# EAGLE board Motorcontroller (EAGLE 6.4)
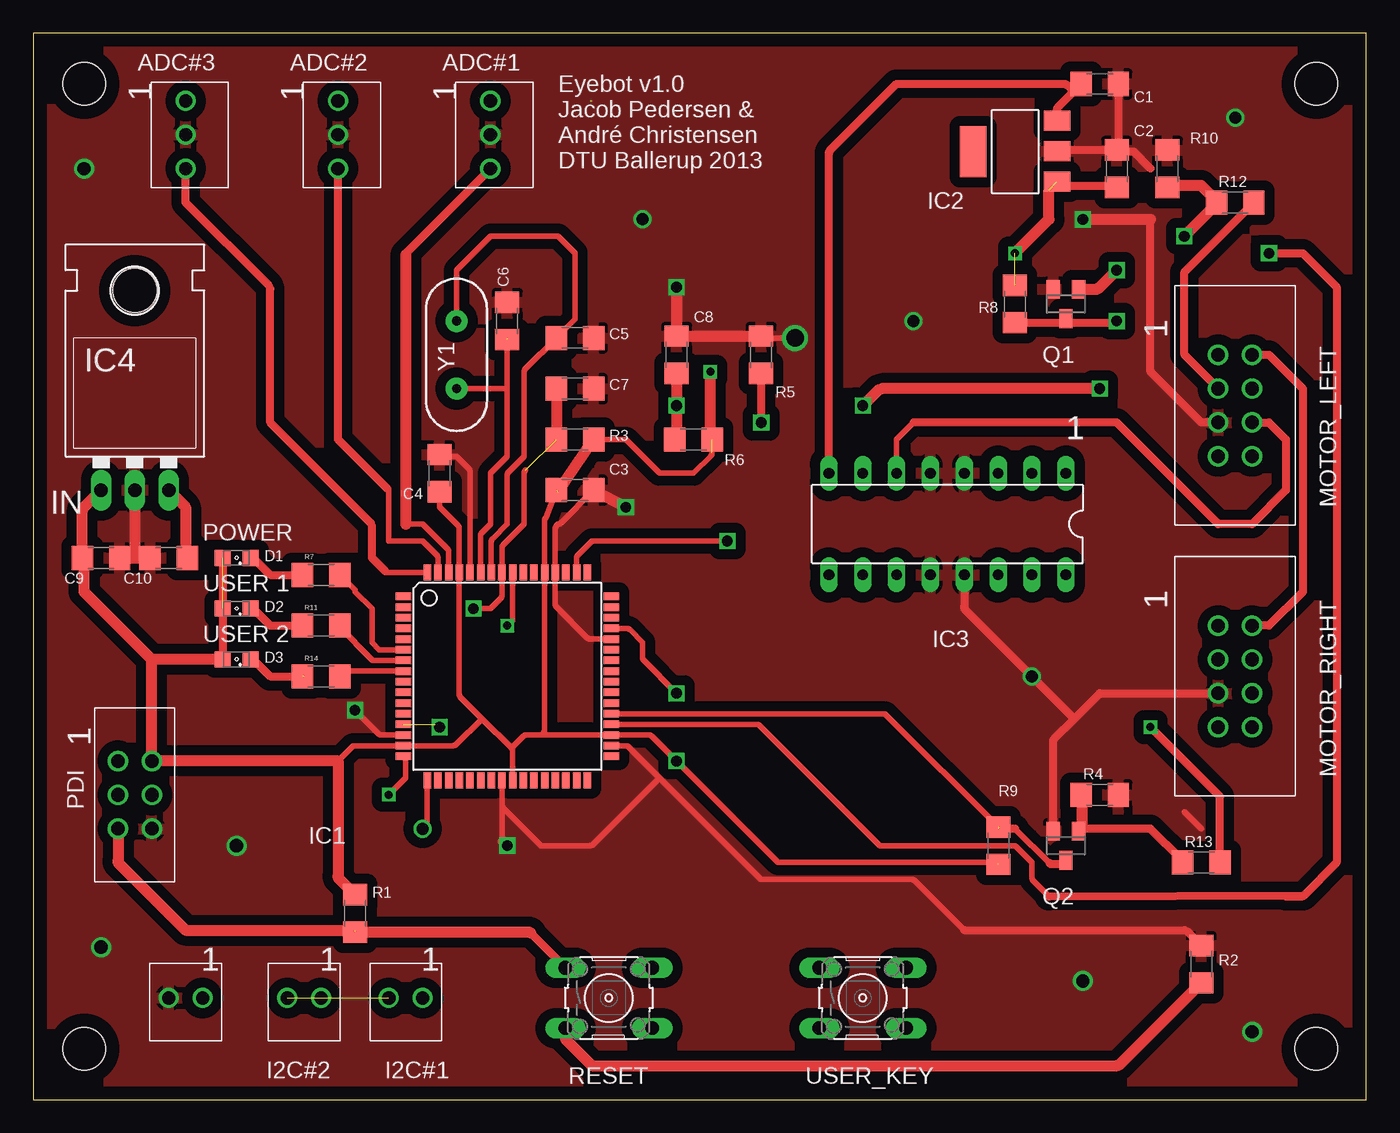
[diagram p0: board, top side]
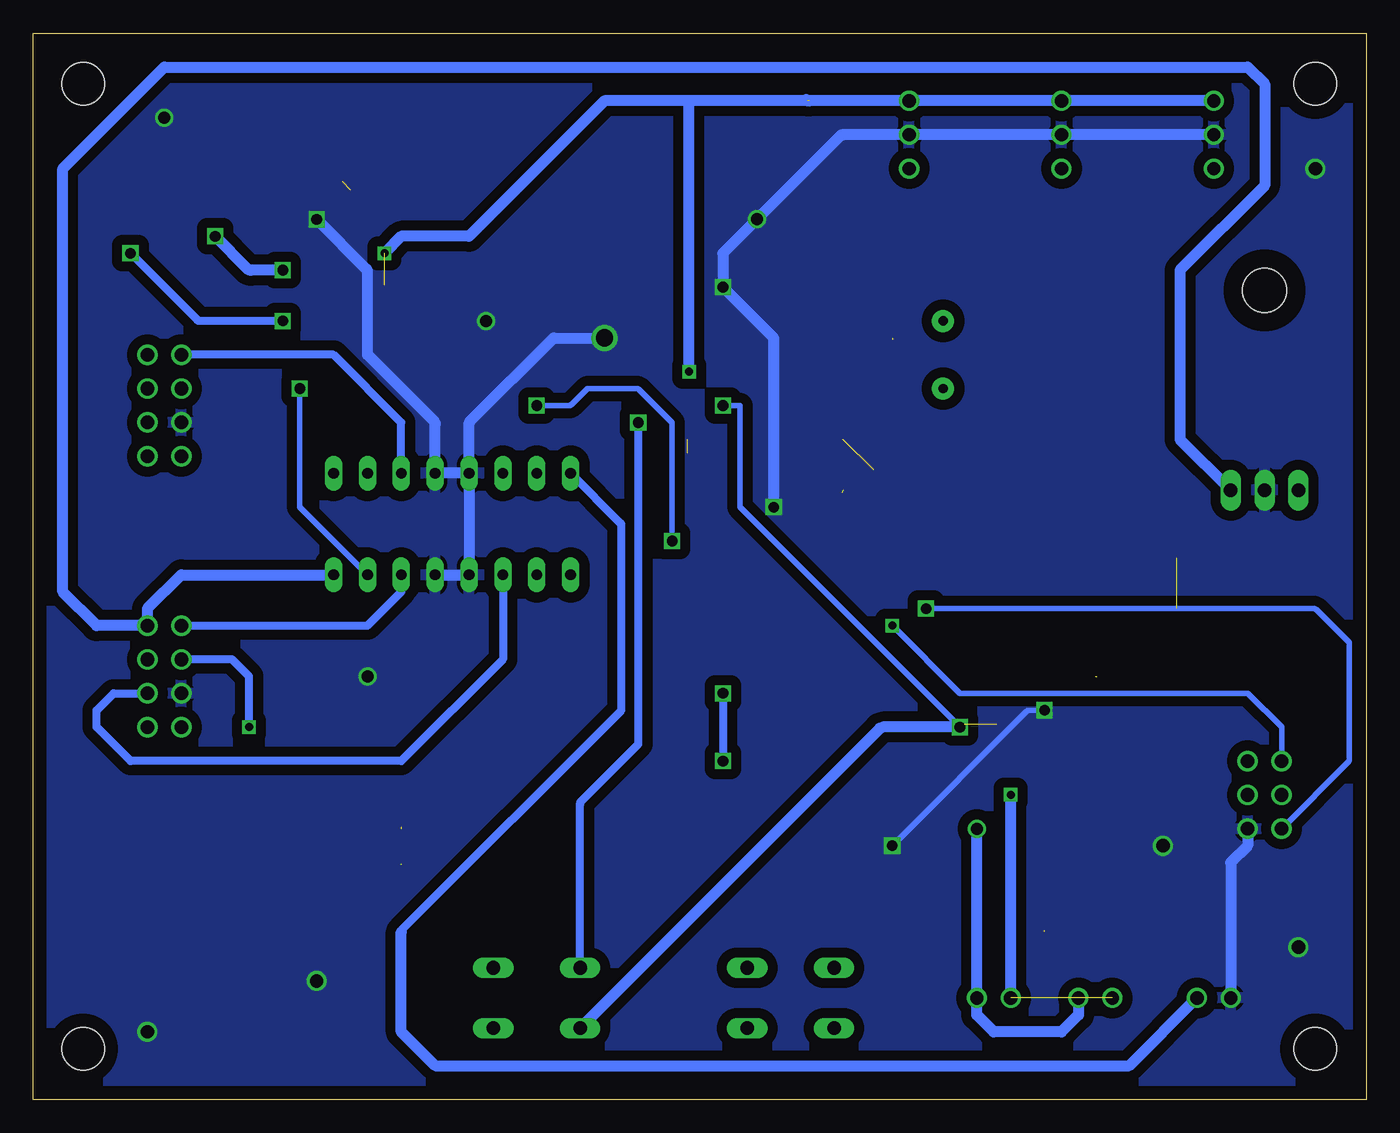
[diagram p1: board, bottom side, seen from below]

Size 100 x 80 mm. Coordinates in mm from the lower left corner, seen from the top.
Outline: 0,0 100,0 100,80 0,80 0,0
Copper layers (1*16): Top 0.035mm / dielectric 1.5mm / Bottom 0.035mm
Design rules "andre": minimum track width 12mil, minimum drill 24mil, track to track 30mil, track to pad 18mil, pad to pad 18mil, via to via 18mil, smd to smd 50mil, copper to edge 40mil, drill to drill 8mil, minimum pad ring 10mil, minimum via ring 8mil, stop-mask expansion 4mil, vias tented up to drill 0mil, thermal gap 10mil
Holes 3.2 mm at 3.81,3.81 96.27,3.81 3.81,76.2 96.27,76.2

## Footprints (pad centres in the part's own frame; a part is rotated, then mirrored left to right if it is on the bottom)
61900311121 = drill 1: 1 1.27,0; 2 -1.27,0; 3 -3.81,0
1206 = smd 1.6 x 1.8: 1 -1.4,0; 2 1.4,0
SML0805 = smd 1.2 x 1.2: A 1.05,0; C -1.05,0
61900211121 = drill 1: 1 1.27,0; 2 -1.27,0
TQFP64 = smd 1.194 x 0.559: 1 -7.8,6; 2 -7.8,5.2; 3 -7.8,4.4; 4 -7.8,3.6; 5 -7.8,2.8; 6 -7.8,2; 7 -7.8,1.2; 8 -7.8,0.4; 9 -7.8,-0.4; 10 -7.8,-1.2; 11 -7.8,-2; 12 -7.8,-2.8; 13 -7.8,-3.6; 14 -7.8,-4.4; 15 -7.8,-5.2; 16 -7.8,-6; 33 7.8,-6; 34 7.8,-5.2; 35 7.8,-4.4; 36 7.8,-3.6; 37 7.8,-2.8; 38 7.8,-2; 39 7.8,-1.2; 40 7.8,-0.4; 41 7.8,0.4; 42 7.8,1.2; 43 7.8,2; 44 7.8,2.8; 45 7.8,3.6; 46 7.8,4.4; 47 7.8,5.2; 48 7.8,6 | smd 0.559 x 1.194: 17 -6,-7.8; 18 -5.2,-7.8; 19 -4.4,-7.8; 20 -3.6,-7.8; 21 -2.8,-7.8; 22 -2,-7.8; 23 -1.2,-7.8; 24 -0.4,-7.8; 25 0.4,-7.8; 26 1.2,-7.8; 27 2,-7.8; 28 2.8,-7.8; 29 3.6,-7.8; 30 4.4,-7.8; 31 5.2,-7.8; 32 6,-7.8; 49 6,7.8; 50 5.2,7.8; 51 4.4,7.8; 52 3.6,7.8; 53 2.8,7.8; 54 2,7.8; 55 1.2,7.8; 56 0.4,7.8; 57 -0.4,7.8; 58 -1.2,7.8; 59 -2,7.8; 60 -2.8,7.8; 61 -3.6,7.8; 62 -4.4,7.8; 63 -5.2,7.8; 64 -6,7.8
SOT223 = smd 1.499 x 2.007: 1 -2.261,-3.15; 2 0.025,-3.15; 3 2.311,-3.15 | smd 3.81 x 2.007: 4 0,3.15
DIL16 = drill 0.813 long: 1 -8.89,-3.81; 2 -6.35,-3.81; 3 -3.81,-3.81; 4 -1.27,-3.81; 5 1.27,-3.81; 6 3.81,-3.81; 7 6.35,-3.81; 8 8.89,-3.81; 9 8.89,3.81; 10 6.35,3.81; 11 3.81,3.81; 12 1.27,3.81; 13 -1.27,3.81; 14 -3.81,3.81; 15 -6.35,3.81; 16 -8.89,3.81
TO-220-ALT = drill 1.016 long: GND 0,-3.81; IN -2.54,-3.81; OUT 2.54,-3.81 | hole 3.302: 0,11.176
612008235121 = drill 1.02: 1 -2.54,-1.27; 2 -2.54,1.27; 3 0,-1.27; 4 0,1.27; 5 2.54,-1.27; 6 2.54,1.27; 7 5.08,-1.27; 8 5.08,1.27
61200622323 = drill 1.02: 1 -2.54,-1.27; 2 -2.54,1.27; 3 0,-1.27; 4 0,1.27; 5 2.54,-1.27; 6 2.54,1.27
SOT23 = smd 1 x 1.4: 1 -0.95,-1.1; 2 0.95,-1.1; 3 0,1.1
B3F-10XX = drill 1.016 long: 1 -3.251,2.261; 2 3.251,2.261; 3 -3.251,-2.261; 4 3.251,-2.261
HC49US = drill 0.7 pad 1.651: 1 -2.54,0; 2 2.54,0

## Placement (x,y rotation side)
ADC#1  61900311121  [61900311121]  34.29,73.66 90 top
ADC#2  61900311121  [61900311121]  22.86,73.66 90 top
ADC#3  61900311121  [61900311121]  11.43,73.66 90 top
C1  [1206]  80.01,76.2 0 top
C2  [1206]  81.28,69.85 270 top
C3  [1206]  40.64,45.72 0 top
C4  [1206]  30.48,46.99 90 top
C5  [1206]  40.64,57.15 0 top
C6  [1206]  35.56,58.42 90 top
C7  [1206]  40.64,53.34 180 top
C8  [1206]  48.26,55.88 270 top
C9  [1206]  5.08,40.64 180 top
C10  [1206]  10.16,40.64 0 top
D1  [SML0805]  15.24,40.64 180 top
D2  [SML0805]  15.24,36.83 180 top
D3  [SML0805]  15.24,33.02 180 top
I2C#1  [61900211121]  27.94,7.62 0 top
I2C#2  [61900211121]  20.32,7.62 0 top
IC1  AVR_XMEGA  [TQFP64]  35.56,31.75 0 top
IC2  REG1118  [SOT223]  73.66,71.12 90 top
IC3  L293D  [DIL16]  68.58,43.18 180 top
IC4  [TO-220-ALT]  7.62,49.53 0 top
MOTOR_LEFT  612008235121  [612008235121]  90.17,53.34 270 top
MOTOR_RIGHT  612008235121  [612008235121]  90.17,33.02 270 top
PDI  61200622323  [61200622323]  7.62,22.86 270 top
POWER12V  Power 12V  [61900211121]  11.43,7.62 0 top
Q1  [SOT23]  77.47,59.69 180 top
Q2  [SOT23]  77.47,19.05 180 top
R1  [1206]  24.13,13.97 270 top
R2  [1206]  87.63,10.16 270 top
R3  [1206]  40.64,49.53 0 top
R4  [1206]  80.01,22.86 0 top
R5  [1206]  54.61,55.88 90 top
R6  [1206]  49.53,49.53 180 top
R7  [1206]  21.59,39.37 0 top
R8  [1206]  73.66,59.69 90 top
R9  [1206]  72.39,19.05 270 top
R10  [1206]  85.09,69.85 90 top
R11  [1206]  21.59,35.56 0 top
R12  [1206]  90.17,67.31 0 top
R13  [1206]  87.63,17.78 0 top
R14  [1206]  21.59,31.75 0 top
RESET  [B3F-10XX]  43.18,7.62 0 top
U$3  [LOGO2]  35.56,2.54 0 top
USER_KEY  [B3F-10XX]  62.23,7.62 0 top
Y1  [HC49US]  31.75,55.88 90 top

## Library data of the parts
ADC#1-ADC#3 I2C#1 I2C#2 POWER12V = Wuerth_Elektronik_eiCan_09_Wire_to_Board_Connectors
C1-C10 = SparkFun-Capacitors
D1-D3 = led
IC1 = ieee-ucsd-lbr_xmega
IC2 = burr-brown; MPN: REG1118-2.85/2K5G4; OC_FARNELL: unknown; OC_NEWARK: 14M2185
IC3 = st-microelectronics; MPN: L293D; OC_FARNELL: 9589619; OC_NEWARK: 56P8249
IC4 = SparkFun-PowerIC
MOTOR_LEFT MOTOR_RIGHT PDI = Wuerth_Elektronik_eiCan_05_Box_Header_IDC_Connectors_1_2
Q1 Q2 = semicon-smd-ipc
R1 = SparkFun-Passives
R2-R14 = SparkFun-Resistors
RESET USER_KEY = switch-omron; MPN: B3F-1000; OC_FARNELL: 176432; OC_NEWARK: 36M3542
U$3 = eyebot
Y1 = SparkFun-FreqCtrl

## Nets
5V: C10.2 IC3.16 IC4.OUT MOTOR_LEFT.2 MOTOR_RIGHT.2
12V: C1.1 IC2.3 IC3.8 POWER12V.1
ADC1: ADC#1.3 IC1.62
ADC2: ADC#2.3 IC1.63
ADC3: ADC#3.3 IC1.64
ENCODER_L_1: MOTOR_LEFT.3 R12.2
ENCODER_L_1_OUT: IC1.36 Q1.3 R8.1
ENCODER_R_1: MOTOR_RIGHT.3 R13.2
ENCODER_R_1_OUT: IC1.37 Q2.3 R9.1
GND: ADC#1.2 ADC#2.2 ADC#3.2 C1.2 C2.1 C3.2 C4.2 C5.2 C6.2 C7.1 C8.1 C9.1 C10.1 IC1.14 IC1.24 IC1.34 IC1.44 IC1.52 IC1.60 IC2.2 IC3.4 IC3.5 IC3.12 IC3.13 IC4.GND MOTOR_LEFT.5 MOTOR_RIGHT.5 PDI.6 POWER12V.2 Q1.2 Q2.2 R2.1 R4.2 R5.2 R10.2
I2C_SCL: I2C#1.1 I2C#2.1 IC1.17
I2C_SDA: I2C#1.2 I2C#2.2 IC1.16
LED_1: IC1.6 R7.2
LED_2: IC1.7
LED_3: IC1.8
MOTOR_L_A1: IC1.48
MOTOR_L_A2: IC1.49
MOTOR_L_POWER_+: IC3.3 MOTOR_LEFT.1
MOTOR_L_POWER_-: IC3.6 MOTOR_LEFT.6
MOTOR_R_A1: IC1.50 IC3.15
MOTOR_R_POWER_+: IC3.14 MOTOR_RIGHT.1
MOTOR_R_POWER_-: IC3.11 MOTOR_RIGHT.6
MOTOT_R_A2: IC1.51
N$1: R11.2
N$2: R14.2
N$4: IC3.1
N$5: C5.1 IC1.58 Y1.2
N$6: C6.1 IC1.59 Y1.1
N$8: R2.2 RESET.3
N$23: Q1.1 R10.1 R12.1
N$25: IC3.2
N$30: R5.1 USER_KEY.1
N$31: D1.C R7.1
N$35: Q2.1 R4.1 R13.1
N$36: IC3.7
N$37: IC3.9
N$38: IC3.10
N$42: D2.C R11.1
N$43: D3.C R14.1
PDI_DATA: IC1.56 PDI.1
PW_MR: IC1.47
PWM_ML: IC1.46
RESET: C7.2 IC1.57 PDI.5 R1.2 R3.1 RESET.1
USER_KEY: C8.2 IC1.13 R6.2 USER_KEY.3
VCC: ADC#1.1 ADC#2.1 ADC#3.1 C2.2 C3.1 C4.1 C9.2 D1.A D2.A D3.A IC1.15 IC1.25 IC1.35 IC1.45 IC1.53 IC1.61 IC2.1 IC4.IN PDI.2 R1.1 R3.2 R6.1 R8.2 R9.2

## Tracks (layer width: path | path; a pad name or v marks a point on that pad's centre or on a via)
5V
  Top 0.61: MOTOR_LEFT.2 92.71,55.88 95.25,53.34 95.25,38.1 92.71,35.56 MOTOR_RIGHT.2
  Top 0.813: IC4.OUT 11.43,44.45 11.43,40.9 arc45 11.52,40.68 C10.2
  Bottom 0.813: IC4.OUT 13.97,49.53 13.97,62.23 7.62,68.58 7.62,76.2 8.89,77.47 90.17,77.47 97.79,69.85 97.79,38.1 95.25,35.56 MOTOR_RIGHT.2 91.44,36.83 88.9,39.37 IC3.16
12V
  Top 0.61: IC2.3 76.81,74.27 arc-45 76.9,74.49 78.04,75.63 | 78.04,75.63 C1.1 | IC3.8 59.69,70.99 arc-45 59.78,71.21 64.77,76.2 77.34,76.2 arc-45 77.56,76.11 78.04,75.63
  Bottom 0.61: 72.39,12.57 arc45 72.3,12.79 55.88,29.21 55.88,43.05 arc-45 55.97,43.27 IC3.8
  Bottom 0.813: 72.39,12.57 72.39,5.08 69.85,2.54 17.78,2.54 POWER12V.1
ADC1
  Top 0.406: 27.94,43.18 29.21,43.18 31.07,41.32 arc-45 31.16,41.1 IC1.62 | 27.94,63.37 arc-45 28.03,63.59
  Top 0.61: 28.03,63.59 ADC#1.3
  Top 0.813: 27.94,63.37 27.94,43.18
ADC2
  Top 0.406: 26.58,45.81 arc-45 26.67,45.59 26.67,41.91 29.21,41.91 30.27,40.85 arc-45 30.36,40.63 IC1.63
  Top 0.61: 26.58,45.81 22.86,49.53 ADC#2.3
ADC3
  Top 0.406: 26.4,39.64 arc45 26.62,39.55 IC1.64 | 25.4,43.05 arc45 25.31,43.27 | 17.78,60.83 arc45 17.69,61.05
  Top 0.61: 26.4,39.64 25.4,40.64 25.4,43.05 | 25.31,43.27 17.78,50.8 17.78,60.83 | 17.69,61.05 11.43,67.31 ADC#3.3
ENCODER_L_1
  Top 0.61: MOTOR_LEFT.3 86.36,55.88 86.36,62.1 R12.2
ENCODER_L_1_OUT  (via drill 0.8)
  Top 0.406: 76.2,15.24 75.02,16.42 arc-45 74.93,16.64 74.93,17.78 73.75,18.96 arc45 73.53,19.05 63.5,19.05 54.49,28.06 arc45 54.27,28.15 IC1.36
  Top 0.61: R8.1 77.04,58.29 | 77.04,58.29 arc45 77.26,58.38 Q1.3 | 93.98,15.24 95.12,15.24 arc45 95.34,15.33 | 95.34,15.33 97.79,17.78 97.79,60.96 95.34,63.41 arc45 95.12,63.5 v92.71,63.5 | 77.04,58.29 81.02,58.29 arc45 81.24,58.38 v81.28,58.42 | 76.2,15.24 95.34,15.33
  Bottom 0.61: v81.28,58.42 87.5,58.42 arc45 87.72,58.51 v92.71,63.5
ENCODER_R_1  (via drill 0.6)
  Top 0.61: R13.2 89.03,22.73 v83.82,27.94
  Bottom 0.61: v83.82,27.94 83.82,31.75 85.09,33.02 MOTOR_RIGHT.3
ENCODER_R_1_OUT  (1 unrouted)
  Top 0.406: R9.1 63.98,28.86 arc45 63.76,28.95 IC1.37 | 76.24,17.74 73.66,20.32
  Top 0.61: Q2.3 77.26,17.74 arc-45 77.04,17.65 76.46,17.65 arc-45 76.24,17.74 | 73.66,20.32 72.39,20.32
GND  (via drill 0.8, 0.9, 1, 1.3 pad 0.81)
  Top 0.406: 87.63,20.32 86.36,21.59 | C3.2 39.59,43.27 arc-45 39.37,43.18 39.25,43.06 arc45 39.16,42.84 IC1.52 39.16,37.17 arc45 39.25,36.95 41.56,34.64 arc45 41.78,34.55 IC1.44 | IC1.34 44.44,26.55 arc-45 44.66,26.46 46.99,24.13 | 46.99,24.13 54.61,16.51 65.91,16.51 arc-45 66.13,16.42 69.85,12.7 | 86.36,12.7 arc-45 86.58,12.61 | 35.25,19.36 arc-45 35.16,19.58 IC1.24 35.16,22.12 arc45 35.25,21.9 38.1,19.05 41.78,19.05 arc45 42,19.14 46.99,24.13 | IC1.14 26.12,27.35 arc-45 25.9,27.44 v24.13,29.21 | v57.15,57.15 54.87,57.15 arc-45 54.65,57.24 R5.2 | IC1.60 32.76,47.12 arc45 32.67,47.34 31.75,48.26 30.74,48.26 arc-45 30.52,48.35 C4.2
  Top 0.61: MOTOR_LEFT.5 87.76,50.8 arc-45 87.54,50.89 83.82,54.61 83.82,66.04 | 83.82,69.85 82.55,71.12 81.54,71.12 arc-45 81.32,71.21 C2.1 | C1.2 81.41,71.51 arc-45 81.32,71.29 C2.1 | C2.1 77.05,71.25 arc45 IC2.2 | Q2.2 76.52,26.86 arc-45 76.61,27.08 78.11,28.57 | 78.11,28.57 80.01,30.48 MOTOR_RIGHT.5 | IC3.13 69.85,36.96 arc45 69.94,36.74 v74.93,31.75 78.11,28.57 | 69.85,12.7 86.36,12.7 | 86.58,12.61 R2.1
  Top 0.813: 6.35,40.64 C9.1 7.62,40.64 | 7.62,40.64 C10.1 | IC4.GND 7.62,40.64 | C3.2 v44.45,44.45 | v48.26,60.96 C8.1 R5.2 | v78.74,66.04 83.82,66.04 | 57.11,57.19 v57.15,57.15 | 35.25,19.36 v35.56,19.05
  Bottom 0.406: v24.13,29.21 25.27,29.21 arc-45 25.49,29.12 v35.56,19.05
  Bottom 0.813: ADC#3.2 ADC#2.2 ADC#1.2 39.24,72.39 arc-45 39.46,72.3 v45.72,66.04 48.26,63.5 v48.26,60.96 44.54,57.24 arc45 44.45,57.02 v44.45,44.45 | IC3.5 IC3.4 69.85,50.67 arc-45 69.94,50.89 74.93,55.88 74.93,62.1 arc-45 75.02,62.32 v78.74,66.04 | IC3.5 67.31,50.67 arc45 67.22,50.89 60.96,57.15 v57.15,57.15 | IC3.5 IC3.12 IC3.13 | PDI.6 8.89,19.05 10.16,17.78 POWER12V.2
  other vias: 15.24,19.05 5.08,11.43 78.74,8.89 91.44,5.08 3.81,69.85 90.17,73.66 66.04,58.42
  pour Top: 0,80.01 100.33,80.01 100.33,0 0,0
  pour Bottom: 0,80.01 100.33,80.01 100.33,0 0,0
I2C_SCL  (via drill 0.9)
  Top 0.406: IC1.17 29.56,20.67 v29.21,20.32
  Bottom 0.813: v29.21,20.32 I2C#1.1 29.21,6.35 27.94,5.08 22.86,5.08 21.59,6.35 I2C#2.1
I2C_SDA  (via drill 0.6)  (1 unrouted)
  Top 0.406: v26.67,22.86 27.94,24.13 27.94,25.57 IC1.16
  Bottom 0.813: I2C#1.2 v26.67,22.86
LED_1
  Top 0.406: IC1.6 25.94,33.75 25.4,34.29 25.4,36.83 24.13,38.1 24.13,38.23 R7.2
LED_2
  Top 0.406: IC1.7 25.47,32.95 22.86,35.56
LED_3
  Top 0.406: IC1.8 22.99,32.15
MOTOR_L_POWER_+
  Bottom 0.61: IC3.3 72.39,50.8 77.47,55.88 MOTOR_LEFT.1
MOTOR_L_POWER_-
  Top 0.406: IC3.6 64.77,49.53 66.04,50.8
  Top 0.61: MOTOR_LEFT.6 92.71,50.8 93.98,49.53 93.98,45.72 91.44,43.18 88.9,43.18 81.28,50.8 66.04,50.8
MOTOR_R_A1  (via drill 0.8)
  Top 0.406: 63.63,53.34 arc45 63.41,53.25 | v52.07,41.91 41.91,41.91 40.85,40.85 arc45 40.76,40.63 IC1.50
  Top 0.813: v80.01,53.34 63.63,53.34 | 63.41,53.25 v62.23,52.07
  Bottom 0.406: IC3.15 80.01,44.45 v80.01,53.34 | v62.23,52.07 59.82,52.07 arc-45 59.6,52.16 58.42,53.34 54.74,53.34 arc45 54.52,53.25 52.07,50.8 v52.07,41.91
MOTOR_R_POWER_+
  Bottom 0.61: MOTOR_RIGHT.1 74.93,35.56 72.39,38.1 IC3.14
MOTOR_R_POWER_-
  Bottom 0.61: IC3.11 64.77,33.02 72.39,25.4 92.71,25.4 95.25,27.94 95.25,29.21 93.98,30.48 MOTOR_RIGHT.6
N$5
  Top 0.406: IC1.58 34.36,41.85 arc-45 34.45,42.07 35.56,43.18 35.56,46.86 arc-45 35.65,47.08 36.83,48.26 36.83,54.61 arc-45 36.92,54.83 C5.1 40.64,58.55 40.64,63.5 39.37,64.77 34.29,64.77 31.75,62.23 Y1.2
N$6  (1 unrouted)
  Top 0.406: IC1.59 33.56,42.32 arc-45 33.65,42.54 34.29,43.18 34.29,46.99 35.56,48.26 35.56,53.34 | 35.56,53.34 35.56,57.15 arc-45 35.65,57.37 | Y1.1 35.56,53.34
N$8
  Top 0.813: RESET.3 39.93,4.65 arc45 40.02,4.43 41.91,2.54 81.28,2.54 arc45 81.5,2.63 R2.2
N$23  (via drill 0.8)
  Top 0.813: Q1.1 79.71,60.79 arc45 79.93,60.88 v81.28,62.23 | R12.1 arc-45 88.68,67.09 | 88.68,67.09 v86.36,64.77 | 88.68,67.09 88.68,67.53 87.63,68.58 85.22,68.58 R10.1
  Bottom 0.813: v81.28,62.23 83.69,62.23 arc45 83.91,62.32 v86.36,64.77
N$30  (via drill 0.8)
  Top 0.61: R5.1 v54.61,50.8
  Bottom 0.61: USER_KEY.1 58.98,22.17 arc45 58.89,22.39 54.61,26.67 v54.61,50.8
N$31
  Top 0.61: D1.C 16.51,40.64 17.78,39.37 R7.1
N$35
  Top 0.61: R13.1 arc45 86.14,18 83.82,20.32 78.72,20.32 arc45 78.5,20.23 Q2.1
  Top 0.813: 78.72,20.32 78.72,22.75 R4.1
N$42
  Top 0.61: D2.C 16.51,36.83 17.78,35.56 R11.1
N$43  (1 unrouted)
  Top 0.61: D3.C 16.51,33.02 17.78,31.75 20.32,31.75
PDI_DATA  (via drill 0.6)
  Top 0.406: IC1.56 35.96,35.96 v35.56,35.56
  Bottom 0.406: PDI.1 6.35,27.94 8.89,30.48 30.48,30.48 v35.56,35.56
RESET  (via drill 0.8)  (2 unrouted)
  Top 0.406: v33.02,36.83 34.29,36.83 35.07,37.61 arc45 35.16,37.83 IC1.57 35.16,41.38 arc-45 35.25,41.6 36.83,43.18 36.83,46.99 arc-45 36.92,47.21
  Top 0.61: RESET.1 37.33,12.48
  Top 0.813: C7.2 R3.1 | PDI.5 6.35,17.91 arc45 6.44,17.69 11.43,12.7 24.13,12.7 | R1.2 37.11,12.57 arc-45 37.33,12.48
  Bottom 0.406: v33.02,36.83 3.94,36.83 arc45 3.72,36.74 1.27,34.29 1.27,25.53 arc45 1.36,25.31 PDI.5
USER_KEY  (via drill 0.8)  (1 unrouted)
  Top 0.406: 30.14,28.15 arc-45 30.36,28.06 v30.48,27.94
  Top 0.813: C8.2 v48.26,52.07 48.26,49.79 arc-45 48.17,49.57 R6.2
  Bottom 0.406: v30.48,27.94 46.99,44.45 46.99,52.07 v48.26,52.07 | 36.27,27.94 arc-45 36.49,27.85
  Bottom 0.813: v30.48,27.94 36.27,27.94 | 36.49,27.85 USER_KEY.3
VCC  (via drill 0.6, 0.8)  (7 unrouted)
  Top 0.406: 50.93,48.52 arc-45 50.84,48.3 49.53,46.99 47.12,46.99 arc-45 46.9,47.08 44.45,49.53 R3.2 | 22.86,25.4 23.92,26.46 arc-45 24.14,26.55 IC1.15 31.5,26.55 arc45 31.72,26.64 33.66,28.57 | 72.35,17.69 arc45 72.13,17.78 55.88,17.78 v48.26,25.4 46.4,27.26 arc45 46.18,27.35 IC1.35 38.1,27.35 | v48.26,30.48 45.81,32.93 arc-45 45.72,33.15 45.72,34.29 44.75,35.26 arc45 44.53,35.35 IC1.45 | C4.1 30.48,44.45 31.87,43.06 arc-45 31.96,42.84 IC1.61 31.96,30.4 arc45 32.05,30.18 33.66,28.57 | C3.1 38.45,43.66 arc45 38.36,43.44 IC1.53 38.36,27.74 arc-45 38.27,27.52 38.1,27.35 | 33.66,28.57 35.87,26.36 | IC1.25 35.96,26.14 arc45 35.87,26.36 | 38.1,27.35 36.99,27.35 arc45 36.76,27.26 35.87,26.36
  Top 0.61: D1.A D3.A | IC2.1 77.06,68.86 arc-45 77.28,68.77 77.47,68.58 81.02,68.58 arc-45 81.24,68.49 C2.2
  Top 0.813: IC4.IN 3.77,44.41 arc45 3.68,44.19 C9.2 3.72,40.6 arc-45 3.81,40.38 3.81,38.1 8.89,33.02 | 39.24,45.33 arc-45 39.33,45.55 R3.2 | D3.A 8.89,33.02 | R1.1 22.95,16.55 arc-45 22.86,16.77 22.86,25.4 PDI.2 8.89,33.02 | v73.66,63.5 76.2,66.04 76.2,68.25 | R6.1 50.8,49.53 v50.8,54.61
  Bottom 0.61: v48.26,30.48 v48.26,25.4
  Bottom 0.813: ADC#3.1 ADC#2.1 ADC#1.1 41.78,74.93 arc45 42,75.02 | 41.91,74.93 50.8,74.93 | 50.8,74.93 57.15,74.93 67.31,64.77 72.39,64.77 v73.66,63.5 | v50.8,54.61 50.8,74.93

## Text on the board
tNames: 1 | 1 | 1 | Eyebot v1.0 / Jacob Pedersen & / André Christensen / DTU Ballerup 2013 | 1 | 1 | IN | POWER | USER 1 | 1 | USER 2 | 1 | 1 | 1 | 1